# Altium PCB roneMotorBoard-v14.PcbDoc (part 2 of 2)
Units mil, origin at the board's own origin, x right, y up, seen from the top; angles counter-clockwise.
Board outline 3702 x 3936.38 mil, 2 copper layers (Top Layer, Bottom Layer); 104 components, 88 nets, 401 pads, 261 vias.
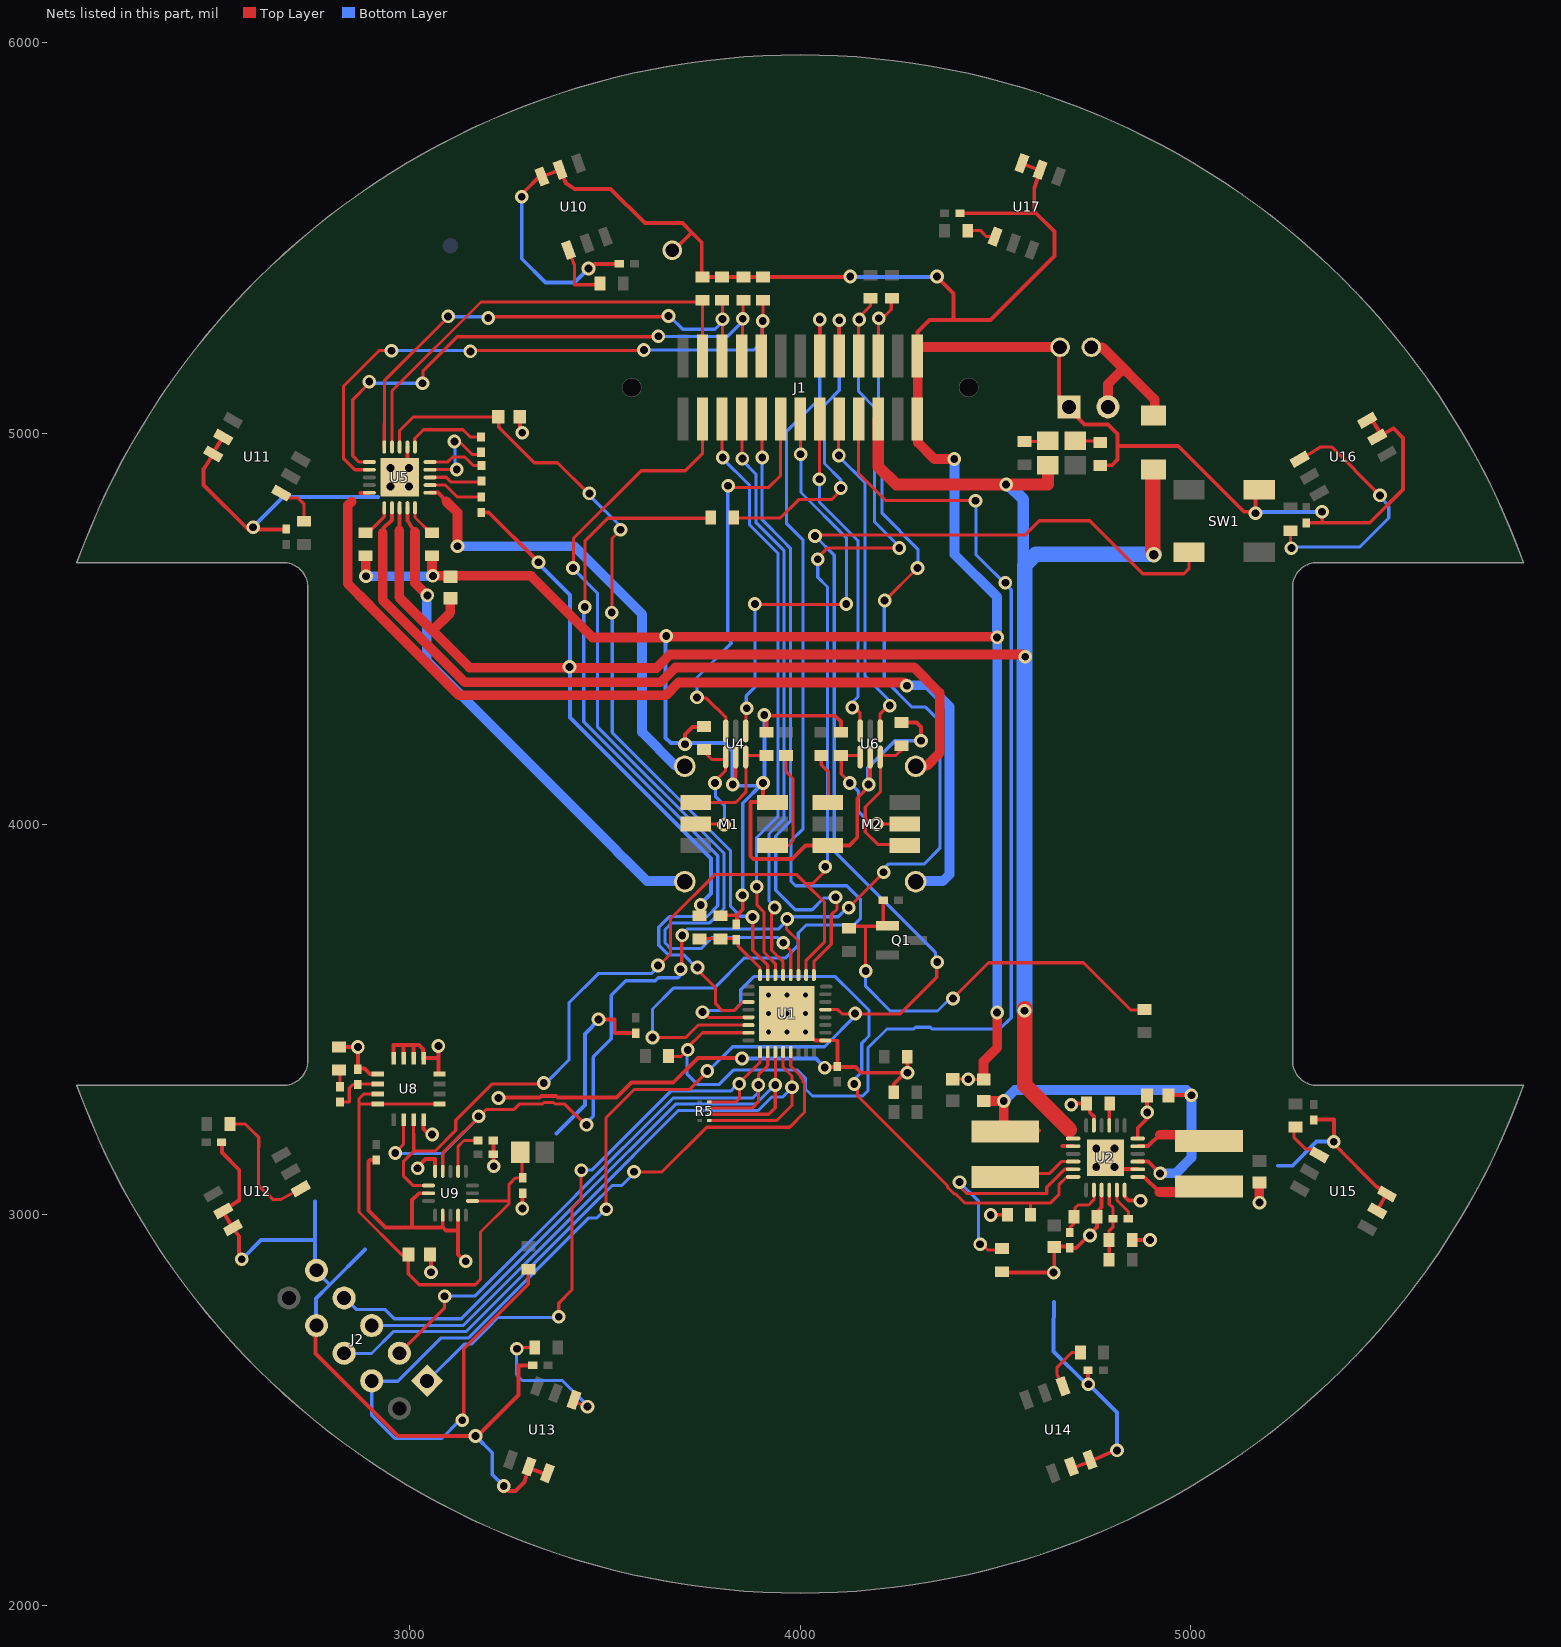
[diagram p2: the nets of this part, all layers, seen from the top]

## Via types
v1: diameter 35, hole 20, Top Layer to Bottom Layer, tented bottom, 231 vias
v2: diameter 25.98, hole 12.99, Top Layer to Bottom Layer, tented both sides, 9 vias
v3: diameter 35, hole 20, Top Layer to Bottom Layer, tented both sides, 8 vias
v4: diameter 152, hole 136, Top Layer to Bottom Layer, tented bottom, 4 vias
v5: diameter 112, hole 96, Top Layer to Bottom Layer, tented bottom, 4 vias
v6: diameter 175, hole 175, Top Layer to Bottom Layer, tented bottom, 2 vias
v7: diameter 40, hole 25, Top Layer to Bottom Layer, tented bottom, 1 vias
v8: diameter 50, hole 35, Top Layer to Bottom Layer, tented bottom, 1 vias
v9: diameter 915, hole 915, Top Layer to Bottom Layer, tented bottom, 1 vias

## Nets (pads, with @x,y where several pads share a name; then routed paths per layer and width w, separated by ;. In a path a pad name is that pad's centre, name@x,y a point inside that pad or via, vN(x,y) a via of type N, cw(c..) or ccw(c..) an arc to the next point about the centre after c; other vN are vias at no path point) (continued)
GND: C1.1 C5.1 C6.1 C7.1 C8.1 C9.2 C10.2 C12.1 C13.1 C14.1 C15.1 C16.1 C17.1 C18.1 C19.1 C20.1 C21.2 C23.1 C24.1 C25.1 C26.1 C27.1 C28.1 C29.1 J1.25 J1.26 J2.8 J2.9 J3.2 J4.1 M1.K M2.K R6.2 R7.2 R8.2 R9.2 R10.2 R11.2 R12.1 R14.1 R15.2 R17.1 R18.1 R19.1 R21.1 R22.2 R24.2 R26.1 R27.2 R28.1 R30.1 R39.1 R50.1 SW1.2 U1.1 U1.33 U2.3 U2.6 U2.8 U2.12 U2.17 U2.25 U4.2 U5.2 U5.21 U6.2 U8.4 U8.8 U8.9 U8.10 U8.11 U8.12 U8.13 U9.5 U9.7 U9.10 U9.12 U10.5 U10.6 U11.5 U11.6 U12.5 U12.6 U13.5 U13.6 U14.5 U14.6 U15.5 U15.6 U16.5 U16.6 U17.5 U17.6 | length 19497.8
  Top Layer w8: U1.1@4067.94,3446 4095,3446 ; C6.1@4390,3347.56 v1@4427.5,3347.56 ; v1@4429.94,3346.06 C8.1@4469,3346.06
  Top Layer w10: 2473.5,4908.5 2473.5,4868 2587.5,4754 C14.1@2685,4754 ; 2474.12,4909.19 U11.6@2498.4,4946.7 ; U11.6@2496.7,4949 U11.5@2520.5,4987.5 ; U12.5@2523.4,3010 2564.5,3037 2564.5,3115 2520.5,3159 2520.5,3177.5 C15.1@2527,3184 ; U12.5@2524,3007 U12.6@2547.4,2966.7 ; U12.6@2538,2960.66 U12.6@2549.84,2960.66 ; U12.6@2548.4,2966.7 2564,2944.5 2564,2891.5 v1@2568.5,2887 ; J2.8@2760,2715 2760,2644.49 2970.49,2434 v1(3169,2434) ; R39.1@2819.5,3429.53 v1@2869.03,3429.53 ; C21.2@2868,3372.69 v1@2868,3429 ; C21.2@2868,3374 2885,3374 2898.61,3360.39 U8.13@2919.26,3360.39 ; 2895,3136.63 2895,3010.87 2938.87,2967 3085,2967 ; 2898.68,3140.32 C23.1@2915,3140.32 ; U8.12@2959.61,3400.74 2959.61,3434 2985.2,3434 ; U8.11@2985.2,3400.74 2985.2,3434 ; U5.21@2995,4907 U5.2@2995,4965.07 ; 3007,2968 3007,3038 3024,3055 U9.7@3048.9,3055 ; U8.10@3010.8,3400.74 3010.8,3433.2 ; v1@3022,3123 3041.63,3142.63 3065.63,3142.63 U9.5@3065.63,3111.1 ; U8.9@3035,3399 3035,3424 3025,3434 2985.2,3434 ; U8.4@3036.39,3243.26 3036.39,3219.11 3050,3205.5 v1(3058,3205.5) ; U8.9@3036.39,3400.74 3074,3400.74 ; v1(3055,2853) C27.1@3055,2895 ; U8.8@3074,3360 3074,3400.74 ; v1@3074,3428.5 3074,3400.74 ; 3085.32,2968.68 U9.10@3085.32,2998.9 ; 3086,2968 3094,2960 3124.69,2960 ; U9.12@3124.69,2998.9 3124.69,2960 ; v1@3145,2878 3124.69,2898.31 3124.69,2960 ; v1@3170.5,2445 3177.75,2437.75 3279,2539 3279,2614.5 C16.1@3314.81,2614.5 ; v1@3214.68,3125.32 C25.1@3214.68,3155 C26.1@3214.68,3190 ; v1@3237.5,3300 3333.52,3300 ; v1(3241.5,2306) 3254.5,2293 3271,2293 3293,2315 ; R27.2@3282.56,5042 3282.56,5006.94 v1(3288.5,5001) ; v1(3287.5,5605) 3287.5,5611.56 U10.6@3340.81,5664.87 ; v1(3289,3016) C24.1@3289,3055 ; 3294.2,2316.47 3305.5,2352 U13.6@3350.67,2335.27 ; 3337.32,3303.8 3375.68,3303.8 ; U10.6@3339.1,5656.11 U10.5@3385.8,5673.97 3400.5,5639.5 3422.12,5625.5 3515,5625.5 3603,5537.5 3698.5,5537.5 3722.5,5513.5 ; 3379.48,3300 3530,3300 3568,3338 3675,3338 3738,3401 v1@3850,3401 ; v1@3463,5421.5 3475,5433.5 C13.1@3536.82,5433.5 ; v1@3485.5,3500 3525.47,3500 3525.47,3465.5 3572.82,3465.5 C28.1@3579.5,3458.82 ; v8@3660,5472 3681,5472 3722.5,5513.5 ; v1(3705,4204) 3705,4229 3724,4248 R17.1@3749.47,4248 ; R6.2@3748,5399.53 3748,5488 3722.5,5513.5 ; R6.2@3751,5399.53 R7.2@3800,5399.53 R8.2@3855,5399.53 R9.2@3905,5399.53 v1@4126.03,5399.53 ; R28.1@3805.5,3766.5 3838,3766.5 C29.1@3838,3752.18 ; v1@3830,4102.5 3835,4126 U4.2@3835,4171.54 ; 3839.5,3767.5 3853,3781 v1@3853,3816 ; 3872.5,4055 3872.5,3917.5 3880,3910 3979,3910 4014,3945 M2.K@4096,3945 ; 3873.5,4056 M1.K@3904.12,4056 ; M1.K@3905,4055.12 v1(3905,4105) ; R15.2@3914,4235 v1@3914,4275 ; v1@3917.5,4277 4089,4277 4104,4262 R14.1@4104,4234.53 ; U1.33@4033.12,3450.88 4037.9,3446.1 U1.1@4064.43,3446.1 ; v1@4058,3378 C1.1@4095,3378 ; M2.K@4094.84,3944.88 4125.88,3944.88 4146,3965 4146,4066 v1@4176.5,4096.5 ; C1.1@4095,3379.68 4095,3444.5 ; C1.1@4096.69,3378 4141,3378 4155.5,3363.5 v1@4262.2,3363.5 ; v1@4179,4101 U6.2@4179,4171.54 ; R30.1@4239.47,3313.5 4239.47,3334.97 4274.5,3370 R50.1@4274.5,3404 ; R12.1@4259,4259.53 4297.47,4259.53 4309,4248 v1(4309,4213) ; J1.26@4300,5239 4300,5259 4331,5290 4392,5290 ; v1@4350,5400 4392,5358 4392,5290 ; C20.1@4414,5563 4603.5,5563 ; v1@4496.5,3000 R19.1@4530.47,3000 ; R18.1@4518,2852 v1(4648.5,2852) ; U17.6@4568,5698.5 U17.6@4568.98,5691.31 ; U17.6@4569.25,5689.35 U17.5@4609.5,5674.29 ; 4599,5628.5 4599,5567.5 4603.5,5563 ; 4599.5,5628.5 U17.5@4614.2,5673.97 ; C10.2@4640,2918.44 C7.1@4690,2918.44 ; v1@4650,2853.5 C10.2@4650,2917.44 ; J3.2@4662,5220 4662,5088 4727.5,5022.5 4787,5022.5 ; C7.1@4690,2915.32 4706.31,2915.32 4760,2969 R21.1@4760,2988 ; U14.5@4695.82,2351.63 U14.6@4737.5,2367 ; v1@4696,3284.5 R22.2@4740.47,3284.5 ; v1@4736.81,2567.18 C17.1@4736.81,2602.5 ; R22.2@4741,3292 4741,3262 4751.47,3251.53 U2.17@4751.47,3228.68 ; U14.6@4743.05,2368.96 v1@4798,2393.5 ; U2.25@4751.47,3175.69 4781,3146.16 U2.25@4771.16,3136.32 ; R21.1@4759,3007 4771.16,3019.16 U2.3@4771.16,3063.32 ; R26.1@4769,4918 4797.5,4918 4812,4932.5 4812,4998 4787.5,5022.5 ; U2.25@4810.53,3107.47 4810.53,3116.63 U2.8@4863.68,3116.63 ; 4815,4967.53 4967.47,4967.53 5136,4799 5165,4799 SW1.2@5165,4846 ; U2.6@4830.21,3046.79 4840.21,3036.79 v1@4871,3036.79 ; R24.2@4849.53,2935 v1@4889,2935 ; U2.12@4863.68,3195.37 4863.68,3221.68 v1@4888,3246 ; v1@4887.44,3261.56 C9.2@4887.44,3305 C9.2@4887.44,3315 ; C19.1@5299,4771 5336,4771 ; C18.1@5320.5,3243.5 5365.5,3243.5 v1(5365.5,3187) ; v1@5336,4799.5 5336,4771 ; v1@5373,3174 5475.5,3071.5 U15.6@5502.45,3054.65 ; U16.6@5461,5037 U16.5@5486.71,4996.4 ; U15.5@5476.6,3010.5 U15.6@5500.34,3053.41 ; U16.5@5487.6,4995 5518,5012.5 ; U15.6@5501.46,3052.96 U15.6@5511.8,3048.74 ; 5518.25,5012.75 5543,4988 5543,4856.5 5457.5,4771 5336,4771 ; 4392,5290 4487,5290 4650.5,5453.5 4650.5,5516 4603.5,5563
  Top Layer w25: v1@2888,4635 R10.2@2888,4686.47 ; v1@3058,4638 R11.2@3058,4686.47 ; v1@3061,4635 3211,4635 ; 3213.5,4635 3311,4635 3468.5,4477.5 v1@3654.71,4477.5 ; v1@3657,4479.79 v1@4504,4479.01 ; J1.26@4301,5196 4301,4976 4343,4934 v1@4393,4934 ; J1.26@4303,5221 J3.2@4653,5221 ; C8.1@4469,3346.06 4469,3392 4504.5,3427.5 v1@4504.5,3512.5 ; v1@5175,3033 C12.1@5175,3082.44
  Bottom Layer w10: v1(2571,2886) 2620,2935 2758.5,2935 ; v1@2599.25,4759.75 2676.5,4837 2920,4837 ; 2758.5,3033.5 2758.5,2935 ; J2.8@2761,2718 2761,2786 2796,2821 ; 2886,2911 2796,2821 ; v1(3169,2434) 3212,2391 3212,2335.5 v1(3241.5,2306) ; v1(3287.5,5605) 3287.5,5446.5 3348.46,5385.54 3422.46,5385.54 v1(3458.41,5421.5) ; 3376,3208 3449,3281 3449,3463 v1@3486.5,3500.5 ; v1@3655.47,4480.47 3655.47,4220.53 3669,4207 3807,4207 3827,4187 3827,4098 v1@3896,4098 ; v1(3851,3400) 4040,3400 4052.5,3387.5 v1@4052.5,3376 ; v1@3853,3819.5 3853,4053 v1@3902.5,4102.5 ; v1@3909,4103 v1@3909,4272 ; v1@4128,5400 v1@4350,5400 ; v1@4174,4101 4174,4144 4243,4213 v1(4309,4213) ; 4648.99,2777.5 4648.5,2694.5 4648.5,2650 v1@4729.5,2569 ; v1(4737.5,2566.5) 4810.5,2493.5 v1(4810.5,2397) ; v1@5163,4798 v1@5330,4798 ; 5222,3125.5 5260,3125.5 5321.5,3187 v1(5365.5,3187) ; 2758.5,2935 2758.5,2858.5 2796,2821
  Bottom Layer w25: v1(2889,4634) v1@3060,4634 ; v1@4395,4929 4395,4690 4503.5,4581.5 v1@4503.5,4478 ; v1@4504,3521 v1(4504,4477.5)
  other v1: 3144,2881 4895,2935.5 4741.5,2947 4487.5,2999.5 5175.5,3031 4871,3036 3021,3119 3216,3124 4888,3262 4693.5,3281.5 3228,3299 4430,3347 4274.5,3363.5 4063,3376.5 2868,3429.5 3074,3432 3484,3500 4504,3517.5 3852,3817.5 3827.5,4101 4175,4101 3908,4279 3657,4481 3060,4635 2600,4759.5 5165,4795 5335.5,4799 4394,4934 4128,5401 4350,5401
  other v2: 3918.76,3467.76 3966,3467.76 4013.24,3467.76 3918.76,3515 3966,3515 4013.24,3515 3918.76,3562.24 3966,3562.24 4013.24,3562.24
  other v3: 4757.38,3122.38 4804.62,3122.38 4757.38,3169.62 4804.62,3169.62 2951.38,4863.38 2998.62,4863.38 2951.38,4910.62 2998.62,4910.62
  other v8: 3672.5,5468
I2C_SCL: J1.22 R1.1 U1.11 U8.2 U9.4 | length 4063.2
  Top Layer w8: v1(2963.5,3158) v1@2968,3153.5 ; v1@2973.25,3148.25 2973.25,3169.25 2985.2,3181.2 U8.2@2985.2,3243.26 ; U9.4@3085.32,3111.1 3085.32,3158.44 3195.87,3269 3266.72,3269 3280.82,3283.1 3340.52,3283.1 ; 3344.32,3286.9 3368.68,3286.9 ; 3372.48,3283.1 3397.9,3283.1 v1@3451,3230 ; v1@3697,3619 v1@3697,3715 ; v1@3965,3753 3965,3731 3995.53,3700.47 U1.11@3995.53,3613.43 ; v1@4130.75,3792.75 v1@4217,3879 ; J1.22@4200,5197.02 v1@4200,5291 ; v1@4211.28,5295 4233,5316.72 R1.1@4233,5334 ; v1@4216.5,4571.5 v1(4300,4655)
  Bottom Layer w8: v1(2963.5,3158) 2970,3151.5 2975.5,3157 3086,3157 v1@3177.75,3248.75 ; v1@3452.5,3234.5 3470.31,3252.31 3470.31,3403.94 3516.5,3450.13 3516.5,3562.22 3553.28,3599 3629,3599 3636.5,3606.5 3687.5,3606.5 3697,3616 v1@3691,3622 ; v1@3697,3717 3711,3731 3944,3731 3975.5,3762.5 4097.5,3762.5 v1@4121,3786 ; v1@4200,5290 4200,5085 4209.5,5075.5 4209.5,4795 4301,4703.5 v1@4301,4654.5 ; v1@4210,3868 4210,3881 4227,3898 4318,3898 4357.5,3937.5 4357.5,4262.5 4321,4299 4286,4299 4215,4370 v1@4215,4569
  other v1: 3453,3230 3177,3252 3694,3628.5 3698,3715 3966.5,3757 4124,3785.5 4213.5,3876.5 4216,4572 4201,5294
I2C_SDA: J1.20 R2.1 U1.10 U8.3 U9.6 | length 3854.5
  Top Layer w8: 3010.8,3206.8 U8.3@3010.8,3243.26 ; 3011,3180 3011,3163 ; 3011,3181 3011,3208 ; U9.6@3048.9,3074.69 3009.31,3074.69 2985,3099 2985,3137 3011,3163 ; v1@3341.5,3335 3211.5,3335 3118.5,3242 3118.5,3216 3065.5,3163 3011,3163 ; v1@3632.75,3632.25 3668,3667.5 3668,3757.5 3781,3870.5 3991,3870.5 4014,3847.5 ; U1.10@4015.21,3613.43 4015.21,3651.21 4062.5,3698.5 4062.5,3799 4014,3847.5 ; v1@4032,4680 4043,4680 4069,4706 v1@4254,4706 ; v1@4063.5,3891 4063.5,3879.5 4031.5,3847.5 4014,3847.5 ; J1.20@4149,5196.02 v1@4149,5294 ; v1@4150,5296 4180,5326 R2.1@4180,5342
  Bottom Layer w8: v1@3338.5,3338.5 3357.5,3338.5 3357.5,3345.5 3408.5,3396.5 3408.5,3542.5 3483,3617 3619,3617 v1@3636.5,3634.5 ; v1@4032,4679 4045,4666 4045,4631.5 4070,4606.5 v1@4070,3897 ; v1@4149,5287 4149,5107 4190,5066 4190,4773.5 v1@4254,4709.5
  other v1: 3343.5,3337 3636,3638 4064,3890.5 4045,4677.5 4253.5,4706.5 4151,5291
JTAG_BOTTOM_TCK: J2.1 R5.4 U1.25 | length 1510.8
  Top Layer w8: v1(3382,2739) 3382,2774 3416,2808 3416,3016 3439,3039 v1@3439,3116 ; R5.4@3766.81,3288.62 3835.62,3288.62 3845,3299 v1@3845,3332 ; v1@3845.5,3338.5 3897.1,3390.1 U1.25@3897.1,3416.57
  Bottom Layer w8: J2.1@3047,2576 3140,2669 3159,2669 3198.13,2708.13 ; 3198.13,2708.63 3226.5,2737 v1@3381,2737 ; v1@3442,3115 3468.12,3115 3670.12,3317 3823,3317 3837,3335 v1(3844,3335)
  other v1: 3440,3114
JTAG_BOTTOM_TDI: J2.7 R5.2 U1.27 | length 1687.7
  Top Layer w8: R5.2@3766.81,3257.13 3919.13,3257.13 3936,3274 v1(3936,3332) ; v1@3936.47,3329.47 U1.27@3936.47,3416.57
  Bottom Layer w8: J2.7@2837,2785 2864.05,2757.95 2937.05,2757.95 2961,2734 3132.63,2734 3441.25,3042.63 ; 3441.25,3042.88 3681.37,3283 3885.72,3283 v1@3934.72,3332
JTAG_BOTTOM_TDO: J2.5 R5.1 U1.28 | length 1719
  Top Layer w8: R5.1@3766.81,3241.38 3940.38,3241.38 3979,3280 v1@3979,3332 ; U1.28@3956.16,3416.57 3956.16,3377.86 3979,3355.01 v1@3979,3332 ; v1(3978.9,3326.55) 3978.9,3331.9 v1@3979,3332
  Bottom Layer w8: J2.5@2904,2717 3138.25,2717 3457.25,3036 ; 3457.25,3036.25 3688,3267 3892.35,3267 3926.85,3301.5 3955.63,3301.5 3979,3324.87 3979,3332 3978.9,3331.9 v1(3978.9,3326.55)
JTAG_BOTTOM_TEST: J2.6 U1.29 | length 1604.1
  Top Layer w8: v1@3570,3109.5 3646,3109.5 3760.5,3224 3973,3224 4011,3262 4011,3316.24 ; U1.29@3975.84,3416.57 3975.84,3380.66 4001.3,3355.2 4001.3,3351.16 4007.5,3344.96 4007.5,3340 ; 4007.4,3339.62 4011,3336.03 4011,3316.44
  Bottom Layer w8: J2.6@2834,2645 2903,2645 2959,2701 3144.88,2701 3462.88,3019 ; 3463,3019 3519,3075 3543.5,3075 v1@3574.5,3106
  other v1: 3574.5,3110
JTAG_BOTTOM_TMS: J2.3 R5.3 U1.26 | length 1481.8
  Top Layer w8: J2.3@2974,2646 3090,2762 v1(3090,2791.5) ; R5.3@3766.81,3272.87 3876.87,3272.87 3893,3289 v1(3893,3332) 3893,3358 3916.79,3381.79 U1.26@3916.79,3416.57
  Bottom Layer w8: v1@3090.57,2792.43 3168.43,2792.43 3425.25,3049.25 ; 3425.25,3049.51 3674.75,3299 3879,3299 3893,3313
LED_RESET: J1.16 U1.22 | length 2822.3
  Top Layer w8: v1@3622.1,3453.6 3707.5,3453.6 3739.4,3485.5 3786.86,3485.5 ; 3786.89,3485.47 U1.22@3867.57,3485.47 ; J1.16@4050,5197.02 v1(4050,5291)
  Bottom Layer w8: v1(3622,3453.5) 3622,3526.5 3675.5,3580 3780,3580 3857.5,3657.5 3963,3657.5 3995,3689.5 3995,3721 4016,3742 4138.5,3742 4154,3757.5 4154,3807.5 4119.5,3842 3988,3842 3976,3854 3976,3956.5 4007.5,3988 4007.5,4726.5 3964.5,4769.5 3964.5,5003.5 4050,5089 v1(4050,5291)
MOT0_CUR: R11.1 U5.15 | length 77.7
  Top Layer w8: U5.15@3014.37,4809.24 3014.37,4784.37 R11.1@3051.74,4747
MOT0_PWMA: J1.4 R6.1 U5.4 | length 1169.5
  Top Layer w8: U5.4@2955.32,4964.76 2955.32,5108.31 3183,5336 R6.1@3746,5336 ; J1.4@3750,5197.02 R6.1@3750,5338
MOT0_PWMB: J1.6 R7.1 U5.5 | length 1274.9
  Top Layer w8: U5.5@2935.63,4964.76 2935.63,5023.37 ; 2936,5023 2936,5134.5 v1@3100,5298.5 ; v1@3196.5,5298 3663,5298 v1@3665,5298 ; J1.6@3801,5197.02 v1(3801,5292) R7.1@3801,5341
  Bottom Layer w8: v1@3100,5298 v1@3206,5298 ; v1@3667.5,5297.5 3699,5266 3782,5266 v1@3801,5285
  other v1: 3201.5,5295 3099,5299 3663,5300
MOT1_A: M2.M2 U5.10 | length 2463.1
  Top Layer w10: 2874.94,4847.44 U5.10@2896.56,4847.44
  Top Layer w25: 2842,4815 2842,4615 2898.5,4558.5 ; 2843,4816 2851.5,4824.5 ; 2898.5,4557.5 3126.5,4329.5 3656,4329.5 3688.5,4362 v1@4265,4362 ; v1@4265.5,4362.5 v1@4273.71,4354.75
  Bottom Layer w25: v1@4275,4355 4327,4355 4382,4300 4382,3871 4365,3854 M2.M2@4284,3854
  other v1: 4273,4354
MOT1_B: M2.M1 U5.12 | length 2015
  Top Layer w10: 2934,4747 2934,4757 2955,4778 U5.12@2955,4808.24
  Top Layer w25: 2931.5,4745 2931.5,4572.67 3141.67,4362.5 3642.33,4362.5 3680.5,4400.67 4291.83,4400.67 4357,4335.5 4357,4184 ; M2.M1@4302,4149 4324,4149 4355,4180
MOT1_CUR: R10.1 U5.11 | length 75.8
  Top Layer w8: R10.1@2898.03,4749.03 2935.63,4786.63 U5.11@2935.63,4809.24
MOT1_PWMA: J1.8 R8.1 U5.6 | length 1432.7
  Top Layer w8: U5.6@2897.24,4926.37 2870.63,4926.37 2855,4942 2855,5086 v1@2897.5,5128.5 ; v1@3034.97,5131.23 3034.97,5159.47 3122.5,5247 v1@3637,5247 ; J1.8@3852,5201.02 v1@3852,5292 ; v1@3854,5289 3854,5340.47 R8.1@3854,5342
  Bottom Layer w8: v1@2897,5128 v1@3032.5,5128 ; v1(3637,5248) 3815,5248 v1@3854.5,5287.5
  other v1: 3033.5,5128 2897,5132 3853,5293
MOT1_PWMB: J1.10 R9.1 U5.7 | length 1577.8
  Top Layer w8: U5.7@2897.24,4906.69 2860.32,4906.69 2831,4936 2831,5119.5 2923.5,5212 v1@2958,5212 ; v1@3158.5,5211.42 v1@3600,5211 ; J1.10@3902,5203.02 v1@3902,5284 ; v1@3905,5280 R9.1@3905,5342.47
  Bottom Layer w8: v1@2955.5,5212 v1@3156,5212 ; v1(3600,5213) 3881,5213 3903,5235 v1@3903,5288
  other v1: 3156,5209.5 2954,5211 3904,5287
MOT_0A: M1.M2 U5.16 | length 1164.9
  Top Layer w10: U5.16@3052.07,4847.94 3073.06,4847.94 3094,4827
  Top Layer w25: 3094,4826 3123,4797 v1(3123,4711)
  Bottom Layer w25: v1(3123,4711) 3421,4711 3595,4537 3595,4235 3680,4150 M1.M2@3701,4150
MOT_0B: M1.M1 U5.14 | length 1296.2
  Top Layer w10: U5.14@2995,4809.56 2995,4777 3014,4747
  Top Layer w25: 3014,4747 3014,4617 v1(3046,4585)
  Bottom Layer w25: v1@3044.5,4576 3044.5,4417.5 3531.5,3930.5 ; 3531.5,3930 3564,3897.5 ; 3564.5,3897.5 3608,3854 M1.M1@3706.19,3854
MOT_SLEEP: R27.1 U1.15 U5.3 | length 2104.9
  Top Layer w8: U5.3@2975,4964.76 2975,5006.5 ; 2975.5,5007 3010.5,5042 R27.1@3227.44,5042 ; R27.1@3228.5,5037.5 3228.5,5015 3319,4924.5 3379,4924.5 v1@3457.5,4846 ; v1@3504,4541 3511.74,4547.68 3518.5,4553.5 3518.5,4730.5 v1@3541,4753 ; v1@3891,3762 3878.5,3749.5 3878.5,3676.5 3916.79,3638.21 U1.15@3916.79,3613.43
  Bottom Layer w8: v1@3460.5,4841.5 v1@3541.5,4760.5 ; v1@3504,4541 3519,4526 3519,4233.8 3822,3930.8 3822,3789 3847,3764 v1@3891,3764
  other v1: 3878,3762 3517.5,4541 3540,4753 3460.5,4846
NetC2_1: C2.1 U5.19 | length 216.6
  Top Layer w8: U5.19@3052.07,4907 v1@3118,4907 ; v1@3114,4975 3131,4975 3160,4946 C2.1@3184.69,4946
  Bottom Layer w8: v1@3117,4908 v1@3117,4976
  other v1: 3121,4907 3115,4979
NetC2_2: C2.2 U5.1 | length 206.7
  Top Layer w8: U5.1@3013.68,4965.07 3013.68,4986.68 3036,5009 3137.25,5009 3156.25,4990 C2.2@3181.69,4990
NetC3_1: C3.1 U5.18 | length 134.1
  Top Layer w8: U5.18@3052.07,4887.31 3094.31,4887.31 3106.63,4875 C3.1@3181.06,4875
NetC3_2: C3.2 U5.20 | length 146.3
  Top Layer w8: U5.20@3052.07,4926.68 3098.43,4926.68 3110.75,4939 3142,4939 3163.69,4917.31 C3.2@3184.31,4917.31
NetC4_2: C4.2 U5.17 | length 144.7
  Top Layer w8: U5.17@3052.07,4867.63 3091.37,4867.63 3122.31,4836.69 C4.2@3184,4836.69
NetC7_2: C7.2 R21.2 U2.2 | length 142.7
  Top Layer w8: C7.2@4690,2954.69 4690,2967 4700,2977 R21.2@4700,2994 ; R21.2@4703,3000 4703,3017 4711,3025 4738,3025 4751.47,3038.47 U2.2@4751.47,3063.32
NetC11_1: C11.1 R23.2 R24.1 U2.4 | length 182
  Top Layer w8: R24.1@4790,2941 4790,2958 4800,2968 4800,3019 4791,3027 U2.4@4791,3063.32 ; R23.2@4791,2885.5 R24.1@4791,2937
NetC11_2: C11.2 U2.5 | length 80.5
  Top Layer w8: U2.5@4810.53,3063.32 4810.53,3037.47 4840,3008 C11.2@4840,2995
NetC22_2: C22.2 R39.2 | length 42.3
  Top Layer w8: C22.2@2822.5,3327.69 R39.2@2822.5,3370
NetC26_2: C26.2 U9.2 | length 121.5
  Top Layer w8: U9.2@3124.69,3111.1 3124.69,3175.19 3139.5,3190 C26.2@3176,3190
NetC30_1: C30.1 Q1.1 R25.2 R43.2 | length 1143.2
  Top Layer w8: R43.2@4118,3738.4 4167.5,3738.4 ; v1(4167.5,3624) 4167.5,3738.4 ; 4212.5,3794 4212.5,3738.4 4167.5,3738.4 ; v1@4391,3554 4482,3645 4725,3645 4846,3524 R25.2@4879.5,3524
  Bottom Layer w8: v1(4167.5,3624) 4167.5,3584.5 4230.5,3521.5 4351.5,3521.5 4383.5,3553.5 v1(4391,3553.5)
NetD1_2: D1.2 R20.2 | length 50.5
  Top Layer w8: R20.2@4574,4978.53 D1.2@4624.53,4978.53
NetD2_2: D2.2 R26.2 | length 60.5
  Top Layer w8: D2.2@4704,4980.5 R26.2@4764.5,4980.5
NetL1_1: L1.1 U2.22 | length 188
  Top Layer w8: L1.1@4521,3097.75 4529.25,3106 4638.37,3106 4668.37,3136 U2.22@4693.11,3136
NetL2_1: L2.1 U2.7 | length 183.5
  Top Layer w10: U2.7@4863.68,3096.94 4880.06,3096.94 4919,3058
  Top Layer w25: 4919,3058 L2.1@5031.09,3058
NetL2_2: L2.2 U2.11 | length 158.2
  Top Layer w10: U2.11@4863.68,3175.53 4890,3175.53 ; 4890,3176 4920.91,3205 ; L2.2@5039.41,3206 L2.2@5051,3194.41
  Top Layer w25: 4920.91,3205 L2.2@4994,3205
NetM1_A: M1.A R16.1 | length 306.5
  Top Layer w8: M1.A@3906,3945 3970,3945 3981.5,3956.5 3981.5,4116.5 3964,4134 R16.1@3964,4175.47
NetM2_A: M2.A R13.1 | length 126.9
  Top Layer w8: R13.1@4054,4175.47 4054,4152 4072,4134 M2.A@4072,4056
NetR18_2: R18.2 U2.23 | length 581.7
  Top Layer w8: v1(4407.5,3083.5) 4412,3079 4412,3068.5 4426,3054.5 4631,3054.5 4631,3070.5 4676.97,3116.47 U2.23@4698.32,3116.47 ; v1@4460.5,2929 4479.5,2910 R18.2@4519.5,2910
  Bottom Layer w8: v1(4407.5,3083.5) 4456.5,3034.5 v1@4456.5,2933
  other v1: 4460.5,2924.5
NetR22_1: R22.1 U2.15 | length 56.8
  Top Layer w8: U2.15@4790.84,3228.83 R22.1@4790.84,3285.66
NetR31_1: R31.1 U10.1 | length 149.3
  Top Layer w8: U10.1@3407.22,5468.93 3422.5,5429.5 3422.5,5380 R31.1@3480,5380
NetR32_1: R32.1 U11.1 | length 118.4
  Top Layer w8: U11.1@2671.09,4845.79 2692,4834 2715,4834 2730.5,4818.5 R32.1@2730.5,4769.03
NetR33_1: R33.1 U12.1 | length 360.5
  Top Layer w8: R33.1@2544.5,3232 2580.5,3232 2597.1,3215.4 ; 2597.18,3215.4 2614.4,3198.18 2614.4,3173.82 ; 2613.5,3172.92 2613.5,3076 2650,3039.5 2671.5,3039.5 U12.1@2721.6,3066.7 ; U12.1@2711.15,3061.15 U12.1@2729,3079
NetR34_1: R34.1 U13.1 | length 355.7
  Top Layer w8: v1@3275,2651 3284,2660 R34.1@3320.47,2660 ; U13.1@3421.19,2521.87 v1@3454.5,2508.5
  Bottom Layer w8: v1@3274,2650 3274,2591 3289,2576 3391,2576 v1@3453.5,2513.5
  other v1: 3455.5,2509 3275,2657
NetR35_1: R35.1 U14.1 | length 127.4
  Top Layer w8: U14.1@4670.98,2560.3 4657.5,2592 4657.5,2610 4695,2647.5 R35.1@4716.97,2647.5
NetR36_1: R36.1 U15.1 | length 116
  Top Layer w8: R36.1@5264,3218.5 5264,3197.5 5293.5,3168 5305.5,3168 5318.9,3154.6 5329.2,3154.6 U15.1@5339.4,3148.3
NetR37_1: R37.1 U16.1 | length 636.4
  Top Layer w8: v1@5255,4708 R37.1@5255,4750.47 ; U16.1@5289.4,4938.3 5331,4965 5360,4965 v1@5479.5,4845.5
  Bottom Layer w8: v1@5256,4709 5432,4709 5506,4783 5506,4812.5 v1(5483.5,4841)
  other v1: 5257,4706
NetR38_1: R38.1 U17.1 | length 75.5
  Top Layer w8: R38.1@4431,5513 4436.5,5518.5 4461.27,5518.5 ; 4462,5518 4476.87,5503.13 U17.1@4498.81,5503.13
NetR45_1: R45.1 U1.19 | length 1971.5
  Top Layer w8: v1@3449,4542 3449,4724 3507.5,4782.5 3527.72,4782.5 ; 3527.82,4782.4 3552.18,4782.4 ; 3552.28,4782.5 R45.1@3761.5,4782.5 ; v1@3735,3639 3735,3629 3783.5,3580.5 3783.5,3565.5 ; 3783.5,3564.22 3783.5,3539.78 3800.78,3522.5 ; 3801,3522.5 3830.33,3522.5 3852.36,3544.53 U1.19@3867.57,3544.53
  Bottom Layer w8: v1@3446,4543 3446,4261.54 3789,3918.54 3789,3790.5 3761.5,3763 3665.04,3763 3638,3735.96 3638,3689.37 3662.37,3665 3702,3665 v1@3734.5,3632.5
  other v1: 3737,3633 3448.5,4555.5
PLLFILT: C21.1 C22.1 U8.14 | length 136.1
  Top Layer w8: C22.1@2823,3288.5 2846,3288.5 2846,3324 2855.32,3333.32 C21.1@2868,3333.32 ; C21.1@2867.5,3334.8 U8.14@2919.26,3334.8
POWER_BUTTON: J1.19 R3.1 U1.23 | length 3122.8
  Top Layer w8: R3.1@3663.53,3405 3687.5,3405 ; 3686,3405 3695,3405 v1(3712,3422) ; v1@3710,3426 3749.79,3465.79 U1.23@3867.57,3465.79 ; J1.19@4149,4996 4149,4898 4219,4828 4436,4828 v1@4450,4814
  Bottom Layer w8: v1@3710,3421 3710,3361 3738,3333 3792,3333 3829,3370 3993,3370 4013.5,3349.5 4013.5,3322 4031.5,3304 4160,3304 4173.5,3317.5 4173.5,3427 4222,3475.5 4290.94,3475.5 4295.24,3479.8 4332.76,3479.8 4337.06,3475.5 4511,3475.5 4540,3504.5 4540,4599 4450,4689 v1@4450,4814
  other v1: 4525,4617.5 4448.5,4827
POWER_EN: R19.2 U1.21 U2.24 | length 1586.9
  Top Layer w8: v1@3757.5,3513 3765.5,3505 U1.21@3867.42,3505 ; v1@4146.5,3334.5 4146.5,3304.5 4377.1,3073.9 ; 4377.1,3070.32 4394.32,3053.1 ; 4397.9,3053.1 4420.5,3030.5 4641.13,3030.5 4662,3051.37 4662,3076.5 4682.29,3096.79 U2.24@4698.32,3096.79 ; R19.2@4589.53,3000 4589.53,3030.47
  Bottom Layer w8: v1@3762,3522.5 3830.48,3522.5 3847.86,3539.88 3847.86,3575.86 3881.5,3609.5 4090,3609.5 4137,3562.5 ; 4137,3562.33 4176,3523.33 4176,3457.5 4157.5,3439 4157.5,3365.5 4138,3346 v1@4138,3335
  other v1: 4138.5,3334.5 3750,3518.5
QEI_0A: J1.11 U4.6 | length 956.8
  Top Layer w8: v1@3737,4322 3760,4322 3810.41,4271.59 U4.6@3810.41,4241.46 ; v1@3820.5,4861.5 3919.5,4861.5 3950,4892 J1.11@3950,5013
  Bottom Layer w8: v1(3736,4324) 3736,4375 3824.5,4463.5 3814.5,4473.5 v1@3814.5,4852.5
  other v1: 3815.5,4865.5
QEI_0A_ANALOG: M1.E1 R17.2 U4.1 | length 335.5
  Top Layer w8: M1.E1@3708.31,4000 M1.E1@3732.52,4000 v1@3804,4000 ; R17.2@3759,4180 3774,4165 3809,4165 3809,4136 3783,4111 v1@3783,4097
  Bottom Layer w8: v1@3783,4099 3783,4071 3806,4048 v1@3806,4004
  other v1: 3805,3998 3782,4105
QEI_0B: J1.13 U4.4 | length 1099.1
  Top Layer w8: U4.4@3861.59,4241.46 v1@3861.59,4308.41 ; v1@3884,4562 v1@4119,4562 ; v1(4001,4946) J1.13@4001,5031
  Bottom Layer w8: v1@3861,4291 v1@3861,4308 ; v1@3862,4300 3862,4328 3884,4350 v1@3884,4562 ; v1@4002,4941 4002,4848.37 4118,4732.37 v1@4118,4565
  other v1: 3863,4296 3884,4563 4118,4563
QEI_0B_ANALOG: M1.E2 R15.1 U4.3 | length 318.9
  Top Layer w8: M1.E2@3710,4055 3835,4055 3861,4081 U4.3@3861,4186.13 ; U4.3@3862,4175.47 R15.1@3914,4175.47
QEI_1A: J1.15 U6.6 | length 864.2
  Top Layer w8: v1(4049,4882) J1.15@4049,5048 ; v1@4133,4304 4153.41,4283.59 U6.6@4153.41,4238.46
  Bottom Layer w8: v1@4049,4880 4049,4824 4148,4725 4148,4326 4133,4311 v1@4133,4303
  other v1: 4133,4298
QEI_1A_ANALOG: M2.E1 R14.2 U6.1 | length 354.2
  Top Layer w8: R14.2@4104,4175.47 U6.1@4152.53,4175.47 ; R14.2@4105,4173 4105,4128 v1@4126,4107 ; v1@4207,4000 M2.E1@4267.48,4000 M2.E1@4285,4000
  Bottom Layer w8: v1(4127,4105) 4149.41,4082.59 4149.41,4031.59 4180,4001 v1@4207,4001
  other v1: 4196,4000
QEI_1B: J1.17 U6.4 | length 890.6
  Top Layer w8: v1@4098,4951 J1.17@4098,5038 ; U6.4@4204.59,4238.46 4204.59,4282.59 v1@4232,4310 ; v1@4225,4306 v1@4232,4313
  Bottom Layer w8: v1@4100,4939 4166,4873 4166,4378 4223,4321 v1@4223,4313 ; v1@4223,4298 v1@4223,4313 ; v1@4225,4306 4232,4313 v1@4223,4313
  other v1: 4229,4303 4099,4943
QEI_1B_ANALOG: M2.E2 R12.2 U6.3 | length 422.4
  Top Layer w8: U6.3@4205,4182.13 U6.3@4205,4175.47 ; R12.2@4262,4193 4244.47,4175.47 U6.3@4205,4175.47 ; M2.E2@4293,3948 4198,3948 4166.5,3979.5 4166.5,4043.5 4205,4082 U6.3@4205,4175.47
RESET: J1.18 R45.2 | length 847
  Top Layer w8: R45.2@3841,4783.5 3949.5,4783.5 3996,4830 4080,4830 v1@4104.5,4854.5 ; J1.18@4100,5197.02 v1(4100,5289)
  Bottom Layer w8: v1(4100,5289) 4100,5110 4062,5072 4062,4922.5 4104,4880.5 v1(4104,4860)
RESET_430: J2.4 R4.1 SW1.3 U1.5 | length 5214.4
  Top Layer w8: v1@3139,2478 3139,2657 3304,2822 R4.1@3304,2858 ; v1@3503,3017 3503,3248 3576,3321 3717,3321 v1@3762,3366 ; v1@4041,4740 4576,4740 4612,4776 4741,4776 4876.5,4640.5 4982,4640.5 4994.5,4653 SW1.3@4994.5,4694.5 ; U1.5@4064.43,3524.84 4096.16,3524.84 4107,3514 4256,3514 4349.5,3607.5 v1@4349.5,3637
  Bottom Layer w8: v1(3135,2474) 3129,2474 3082,2427 2964,2427 2903.58,2487.42 2903.58,2568.58 2909,2574 2970,2574 3081,2685 3151.51,2685 3458.51,2992 3480,2992 v1@3503,3015 ; v1@3763.5,3366.5 3827,3430 4062,3430 v1@4145,3513 ; v1(4038,4737) 4087,4688 4087,3930.5 4346,3671.5 v1@4346,3650
  other v1: 3504,3014 3762,3368 4140.5,3515 4350.5,3646.5
SPI_CLK: J1.9 U1.9 | length 1656.5
  Top Layer w8: v1@3902,4938 J1.9@3902,5035.98 ; U1.9@4034.9,3613.43 4034.9,3647.9 4079.5,3692.5 4079.5,3767.5 4094,3782 v1@4094,3809
  Bottom Layer w8: v1@3902.5,4938 3902.5,4778.5 3958.6,4722.4 ; 3937.5,3969.25 3937.5,3830.5 3987.5,3780.5 4030.5,3780.5 4061,3811 v1@4095,3811 ; 3941.1,3972.99 3974.9,4006.79 3974.9,4705.96 3958.6,4722.26
  other v1: 4090.5,3812.5 3903,4938
SPI_MISO: J1.5 U1.14 | length 1515.3
  Top Layer w8: v1@3800,4936 J1.5@3800,5034.98 ; v1@3889,3833.5 3889,3793 3907.5,3774.5 3907.5,3671.5 3936.47,3642.53 U1.14@3936.47,3613.43
  Bottom Layer w8: v1@3800.91,4935.91 3870.5,4866.31 3870.5,4765.25 3943,4692.75 3943,4021 ; v1@3888,3840 3888,3965 3943,4020
  other v1: 3889,3839.5 3802,4938
SPI_MOSI: J1.7 U1.13 | length 1491.5
  Top Layer w8: v1@3851,4933 J1.7@3851,5035.98 ; 3927,3687 3927,3676.25 3956.16,3647.1 U1.13@3956.16,3613.43 ; 3927,3708.28 3927,3773.5 v1@3933.5,3780 ; 3927.1,3683.82 3927.1,3708.18
  Bottom Layer w8: v1@3851.5,4930.5 3886.5,4895.5 3886.5,4771.87 3959,4699.37 3959,4172 ; 3920,3841.38 3920,3803.5 v1@3932.5,3791 ; 3920.1,3841.48 3920.1,3974.33 3925.2,3979.43 ; 3925.2,3979.57 3959,4013.37 3959,4171
  other v1: 3934.5,3786.5 3852,4935
SPI_SEL_MSP430: J1.3 U1.12 | length 2212.5
  Top Layer w8: v1@3411,4660 3420,4669 3420,4731 3593,4904 3706,4904 3749.5,4947.5 J1.3@3749.5,5029.48 ; v1@3964.5,3694 3964.5,3687.5 3975.84,3676.16 U1.12@3975.84,3613.43
  Bottom Layer w8: v1@3424,4648 3481,4591 3481,4249.17 3805,3925.17 3805,3783.87 3768.13,3747 3671.67,3747 3654,3729.33 3654,3696 3669,3681 3746,3681 3775,3710 3942,3710 v1@3953.5,3698.5
  other v1: 3956.5,3696 3418.5,4655
VBAT: C4.1 C5.2 D1.1 F1.1 J1.21 R44.2 U2.19 U5.13 | length 6253.6
  Top Layer w10: 2975,4750 U5.13@2975,4809.24 ; C4.1@3184,4797 3203,4797 v1@3326,4674 ; v1@3321,4666 v1@3329,4674
  Top Layer w25: 2974,4751.5 2974,4580 3154,4400 v1@3408,4400 ; 3060,4496 3104.5,4540.5 C5.2@3104.5,4573 ; v1@3414,4399 3632.16,4399 3666.83,4433.67 4572.83,4433.67 v1@4578.5,4428
  Top Layer w30: J1.21@4200,5036.98 4200,4914.5 4245.5,4869 v1@4525.5,4869 ; v1(4527,4869) 4634,4869 D1.1@4634,4914
  Top Layer w40: v1@4574.5,3527 4574.5,3332 4688.5,3218 ; v7@4902.5,4700.5 4902.5,4903 F1.1@4907,4907.5
  Bottom Layer w10: v1@3320,4668 3329.5,4668 3411,4586.5 3411,4272.5 3772,3911.5 3772,3822.5 v1@3744,3794.5
  Bottom Layer w30: v1@4531.5,4869.5 4570.5,4830.5 4570.5,4601.5
  Bottom Layer w40: v1(4574,3522) v1@4574,4427 ; v1@4575,4422.5 4575,4662.5 4602.5,4690 v7@4906,4690
  other v1: 3745.5,3792.5 3409.5,4402 4576,4428 3330.5,4670
  other v7: 4905,4689
"VBAT +300": C8.2 C9.1 L1.2 U2.9 U2.20 | length 1069.5
  Top Layer w10: L1.2@4581,3215.69 L1.2@4611.31,3215.69 ; 4671,3176 U2.20@4698.32,3176 ; U2.9@4863.68,3136.32 4890.68,3136.32 v1(4921,3106) ; C9.1@4942.56,3315 4951.56,3306 v1(5001,3306)
  Top Layer w25: C8.2@4469.5,3290.94 4521,3290.94 L1.2@4521,3214.25
  Bottom Layer w25: v1@4522.5,3292 4550,3319.5 4988.5,3319.5 v1@5001,3307 ; v1(4921,3106) 4961,3106 5001,3146 v1(5001,3306)
  other v1: 4521,3291
VBAT_IN: F1.2 J3.1 J4.2 | length 375.7
  Top Layer w25: J3.1@4747,5220 4773,5220 4907,5086 F1.2@4907,5034.5 ; J4.2@4787.5,5067.5 4787.5,5126 4823,5161.5
VBAT_SENSE: C29.2 R28.2 R44.1 U1.16 | length 203.7
  Top Layer w8: R44.1@3754.44,3707 3836.5,3707 3841.5,3707 3841.5,3687.5 3897.1,3631.9 U1.16@3897.1,3613.43
VDDA: C24.2 C27.2 L3.1 U8.5 U8.15 U8.16 U9.14 | length 1416.3
  Top Layer w8: 2875.39,3283.61 U8.16@2919.26,3283.61 U8.5@3076.74,3283.61 ; U8.15@2919.26,3309.2 2883.2,3309.2 2871,3297 2871,3007 2982,2896 C27.2@2998.5,2896 ; C27.2@2997,2888.5 2997,2849 3025,2821 3168.37,2821 3182,2834.63 3182,2956 3255,3029 3255,3035.32 ; U9.14@3161.1,3035.32 3255,3035.32 ; C24.2@3288,3104.68 L3.1@3288,3153 ; C24.2@3289,3094 3271,3094 3255,3078 3255,3035.32
pads on no net: J1.c1 J1.c2 J2.10 M1.NC M2.NC SW1.1 SW1.4 U1.4 U1.17 U1.20 U1.31 U2.18 U5.8 U5.9 U8.6 U8.7 U9.3 U9.8 U9.9 U9.11 U9.13 U9.15 U9.16 U10.4 U11.4 U12.4 U13.4 U14.4 U15.4 U16.4 U17.4
copper on no net: | length 14567.9
  Top Layer w10: 2676,3331 ccw(c2676,3394) 2739,3394 ; 2677,3331 2149,3331 ccw(c4000,4000) 5851,3331.01 5323,3331 cw(c5323,3394) 5260,3394 5260,4606 cw(c5323,4606) 5323,4669 5851,4669 ccw(c4000,4000) 2149,4669 2677,4669 cw(c2677,4606) 2740,4606 2740,3394
  other v4: 3255,3492 4745,3492 3255,4508 4745,4508
  other v5: 2907,3646 5093,3646 2907,4354 5093,4354
  other v6: 3550,2740 4450,2740
  other v9: 4000,2740

## Polygon pours and split planes (outlines as drawn)
GND on Bottom Layer "Bottom Layer-gnd" (solid, pour order 6): 3099.65,3487.62 2879.53,3488.5 2801.79,3411.93 2799.91,3301.92 2734.35,3240.32 2733.5,3032.29 2910.44,2861 3218.6,2861.88 3405,3035.26 3405,3201.59
GND on Bottom Layer "MotorGnd" (solid, pour order 5): 2978.77,5072.09 2979.65,5073 3321,5073 3321,4701.39 3141.95,4516.5 2913.5,4516.5 2913.5,5006.51
GND on Bottom Layer "Bottom Layer-GND" (solid, pour order 4): 4252,3400 4258,3394 4586.5,3394 4625,3394 4664.5,3354.5 4666.5,3352.5 5234,3352.5 5234,3020.5 5221.5,3008 4984,2770.5 4567.5,2770.5 4567.5,2884.5 4347,3105 4229.5,3222.5 4229.5,3342 4229.5,3394 4233.5,3398 4266.5,3398

## Keep-outs
Keep-Out Layer:
  circle w5: c3255,3492 r120
  circle w5: c4745,4508.5 r120
Mechanical 1:
  circle w5: c4745,4508 r135
  circle w5: c3255,3492 r135

## Other copper
Top Layer:
  region net MOT1_CUR: 2905,4751 2939,4785 2932,4789 2871,4759
  region net MOT0_CUR: 3040,4753 3011,4783 3018,4787 3075,4759 3047,4756
  region net "VBAT +300": 4673,3181 4622,3221 4596.5,3221 4596.5,3185 4643,3185 4668,3172
  region net NetL1_1: 4670,3133 4667,3140 4642,3125 4608.5,3125 4607.5,3103 4639,3103
  region net NetL2_1: 4877,3093 4910,3049 4920,3050 4918,3070 4883,3100
  region net "VBAT +300": 4885,3134 4909,3099 4931,3098 4929,3122 4891,3141
  region net NetL2_2: 4889,3180 4913,3215 4935,3216 4933,3192 4890,3171
  region net VBAT: 4679.5,3195 4716,3195 4716,3219 4699,3235.5 4679.5,3216.51
  region net 3.3V: 4884,3156 4916.66,3168 4925.66,3168 4925.66,3144 4919,3144
  region net 5VUSB: 4689.32,3156 4643,3168 4626,3168 4626,3144 4644,3144
  region net MOT1_A: 2862,4818 2867,4822 2878,4843 2878,4853 2870,4853 2845,4836
  region net MOT_0A: 3086,4818 3081,4822 3070,4843 3070,4853 3078,4853 3103,4836
  region net MOT_0B: 3002,4748 2990,4776.5 2999,4780 3026,4754 3026,4748
  region net MOT1_B: 2946,4747 2958.5,4775 2949,4779 2922,4753 2922,4747
  region net VBAT: 2986.5,4746.5 2986.5,4751 2980,4775 2970,4775 2961.5,4751.5 2961.5,4746.5

## Silkscreen, mask and mechanical layers (free items; w line width, h text height)
Top Overlay:
  circle w10: c3463,3630 r50
  circle w10: c4410,3625.5 r50
  region: 3999.5,5932 3849.5,5782 3949.5,5782 3949.5,5582 4049.5,5582 4049.5,5782 4149.5,5782
  text "gnd" at 3577,5510 h40
  text "rawbat" at 4857,5095 h40
  text "Motor" at 3061.5,5089 h40
  text "Driver" at 2984.5,5036 h40
  text "+" at 3449.5,3606.5 h40
  text "+" at 4395,3600.5 h40
Bottom Overlay:
  drawing of 29 lines, arcs and shapes, not listed
  text "BUMP0" at 3060.5,5459 h40
  text "gnd" at 3631.5,5455.5 h40
  text "p0B" at 3137,5363 h40
  text "p1B" at 2909,5191.5 h40
  text "p1A" at 2860,5109.5 h40
  text "charge pump" at 2848.5,5067.5 h40 r90
  text "3.3v" at 4964.5,5045.5 h40
  text "powBut" at 4560.5,4569 h30
  text "r-one-v14.0" at 4256,4512 h70
  text "vBat" at 4586.5,4369.5 h40
  text "e0A" at 3722.5,4353.5 h40 r270
  text "e0B" at 3849.5,4330 h40 r270
  text "e1B" at 4213.5,4328.5 h40 r270
  text "e1A" at 4117.5,4326 h40 r270
  text "m1B" at 4457,4134.5 h40
  text "m0A" at 3648,4128.5 h40
  text "m0B" at 3653,3836 h40
  text "m1A" at 4463,3831 h40
  text "SCL" at 3658.5,3705 h40
  text "IRb" at 4246.5,3692.5 h40
  text "chgen" at 4867,3672.5 h40 r270
  text "bumpPwr" at 4928,3671 h40 r270
  text "chg" at 4596.5,3653.5 h40 r270
  text "430sel" at 4053.5,3630 h40
  text "SDA" at 3600,3609.5 h40
  text "5V" at 4511.5,3600 h40
  text "5vB" at 4423.5,3418.5 h40 r270
  text "pEn" at 4230.5,3285.5 h40
  text "vBat300" at 5299,3273.5 h40
  text "LDO" at 4063,3233.5 h40
  text "gnd" at 2891.5,2938 h40 r40
  text "tdi" at 2957.5,2874 h40 r40
  text "tdo" at 3028,2805.5 h40 r40
  text "tms" at 3101,2741.5 h40 r40
  text "tck" at 3172.5,2664 h40 r40
  text "tes" at 2817.5,2602 h40 r40
  text "rst" at 2883.5,2530.5 h40 r40
  text "reset" at 3222,2515 h40 r60
  text "ldo" at 3050.5,2463 h40 r40
Mechanical 1:
  circle w1: c4000,4000 r1550
  circle w5: c4745,3492 r135
  circle w5: c4745,3492 r120
  circle w5: c3255,4508 r135
  circle w5: c3255,4508 r120
  lines w3: 2059,4000 5896,4000 ; 4000,2000 4000,6000

## Text inside footprints (layer, text, board x,y; h text height)
J2: Top Overlay "10" at 2663.16,2843.7 h40 r135; Top Overlay "9" at 2733.87,2914.41 h40 r135; Top Overlay "1" at 3115.71,2532.57 h40 r135; Top Overlay "2" at 3054,2451 h40 r135